# Altium PCB orbit_PA_devboard.PcbDoc
Units mil, origin at the board's own origin, x right, y up, seen from the top; angles counter-clockwise.
Board outline 1563 x 1383 mil, 4 copper layers (Top Layer, Signal Layer 1, Signal Layer 2, Bottom Layer), stack 30.634 mil thick; 24 components, 13 nets, 74 pads, 167 vias.
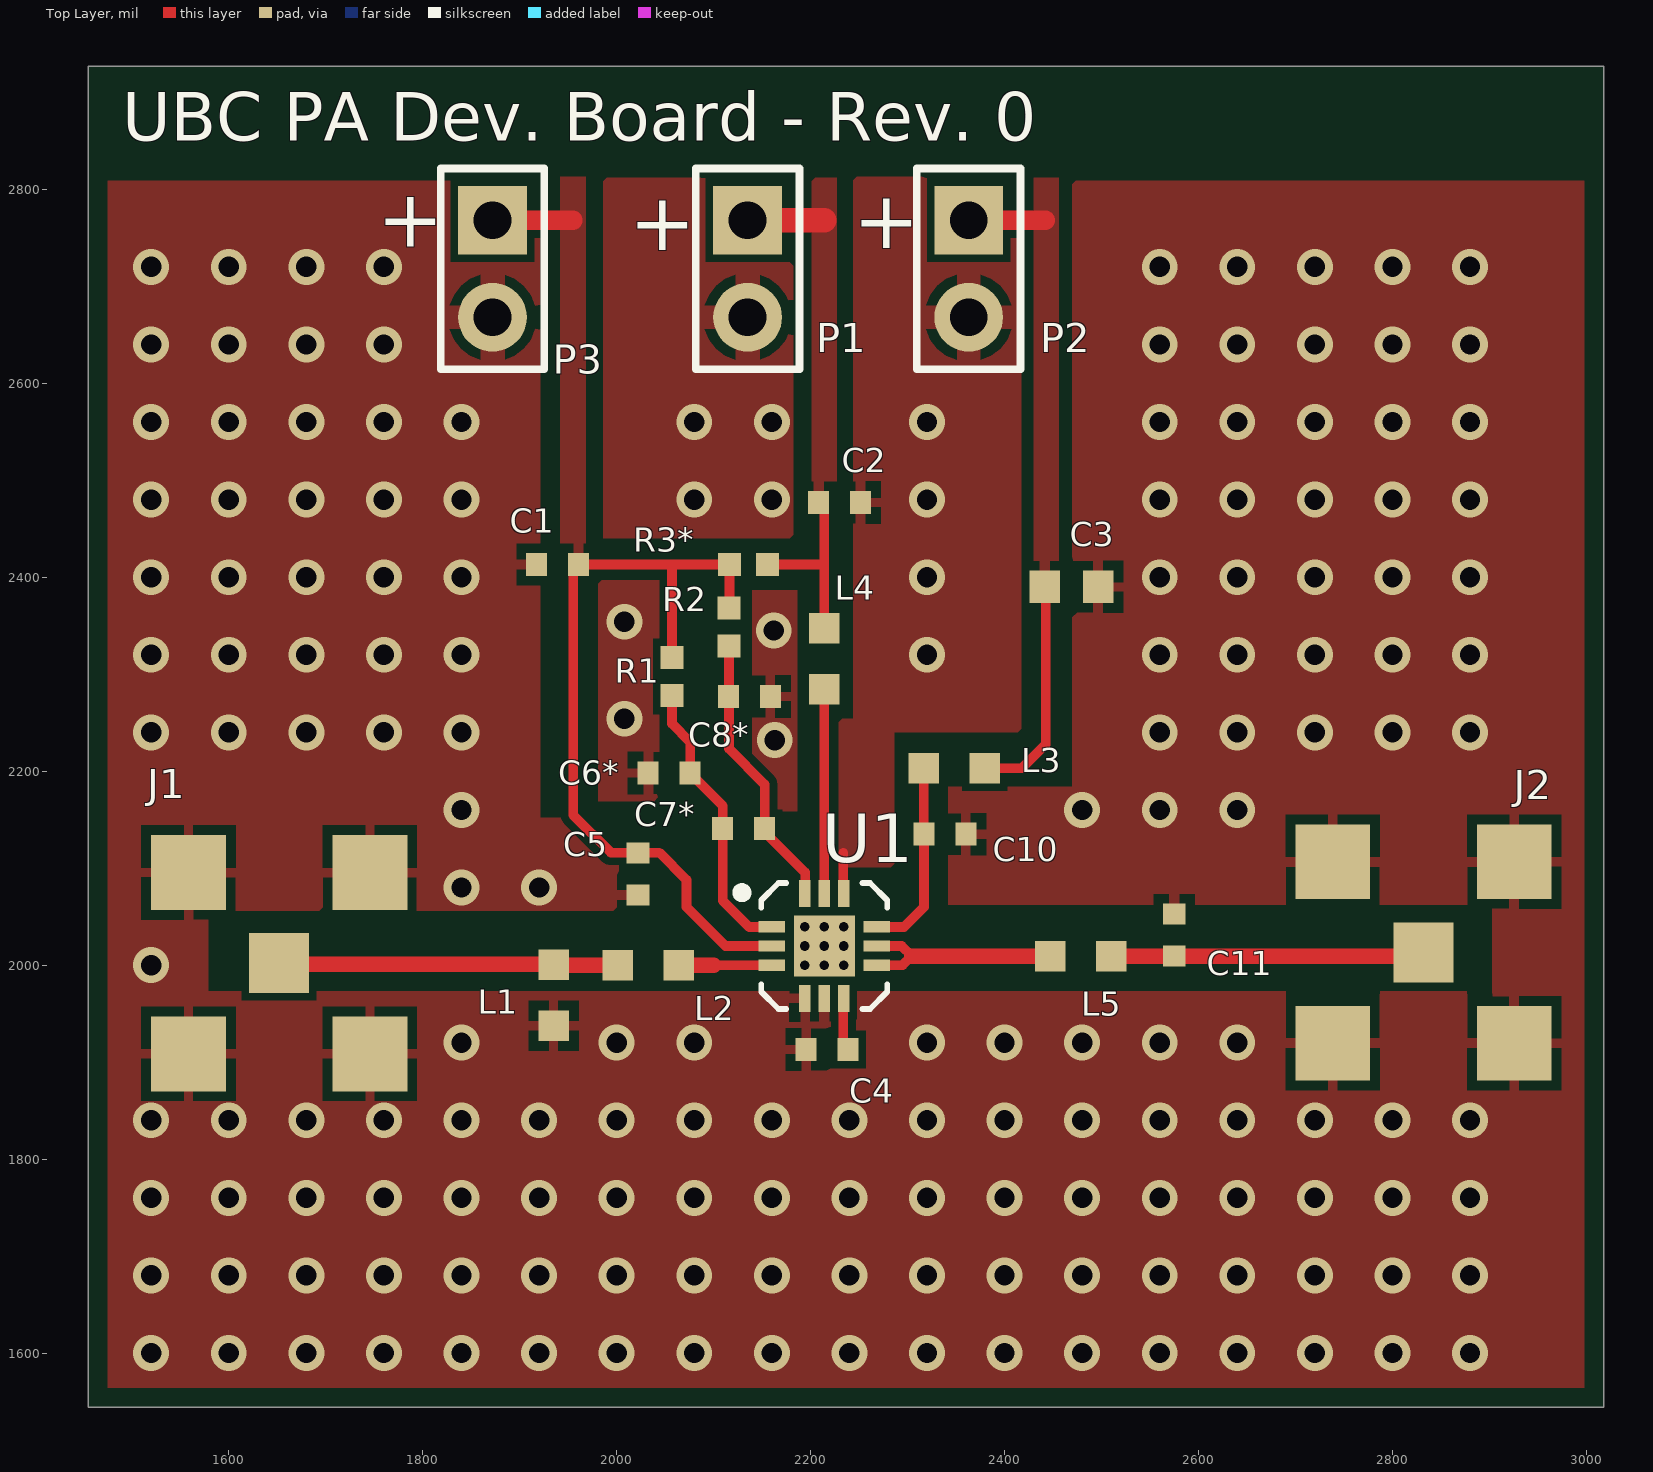
[diagram p0: Top Layer view]
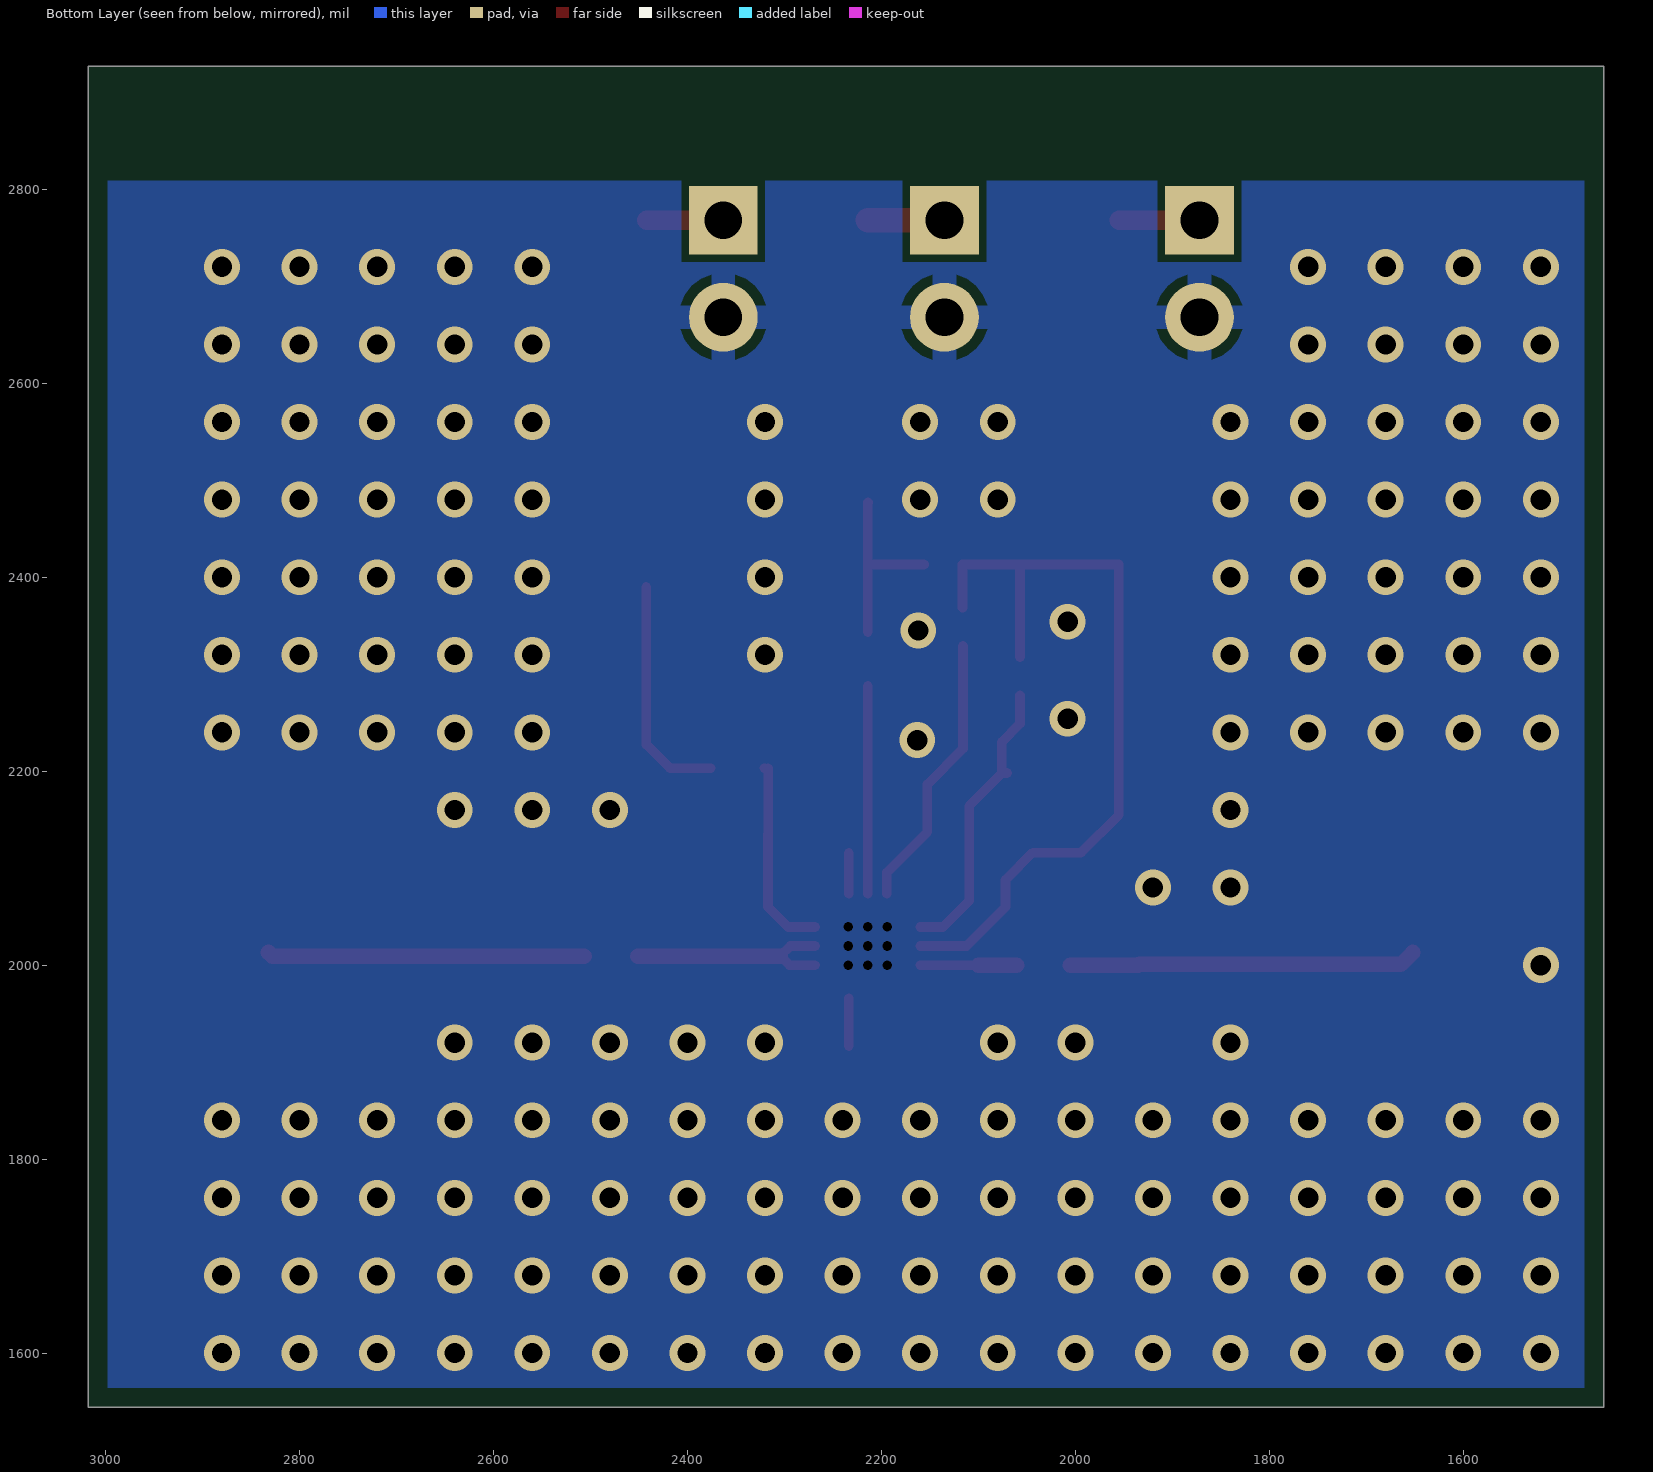
[diagram p1: Bottom Layer view, seen from below]
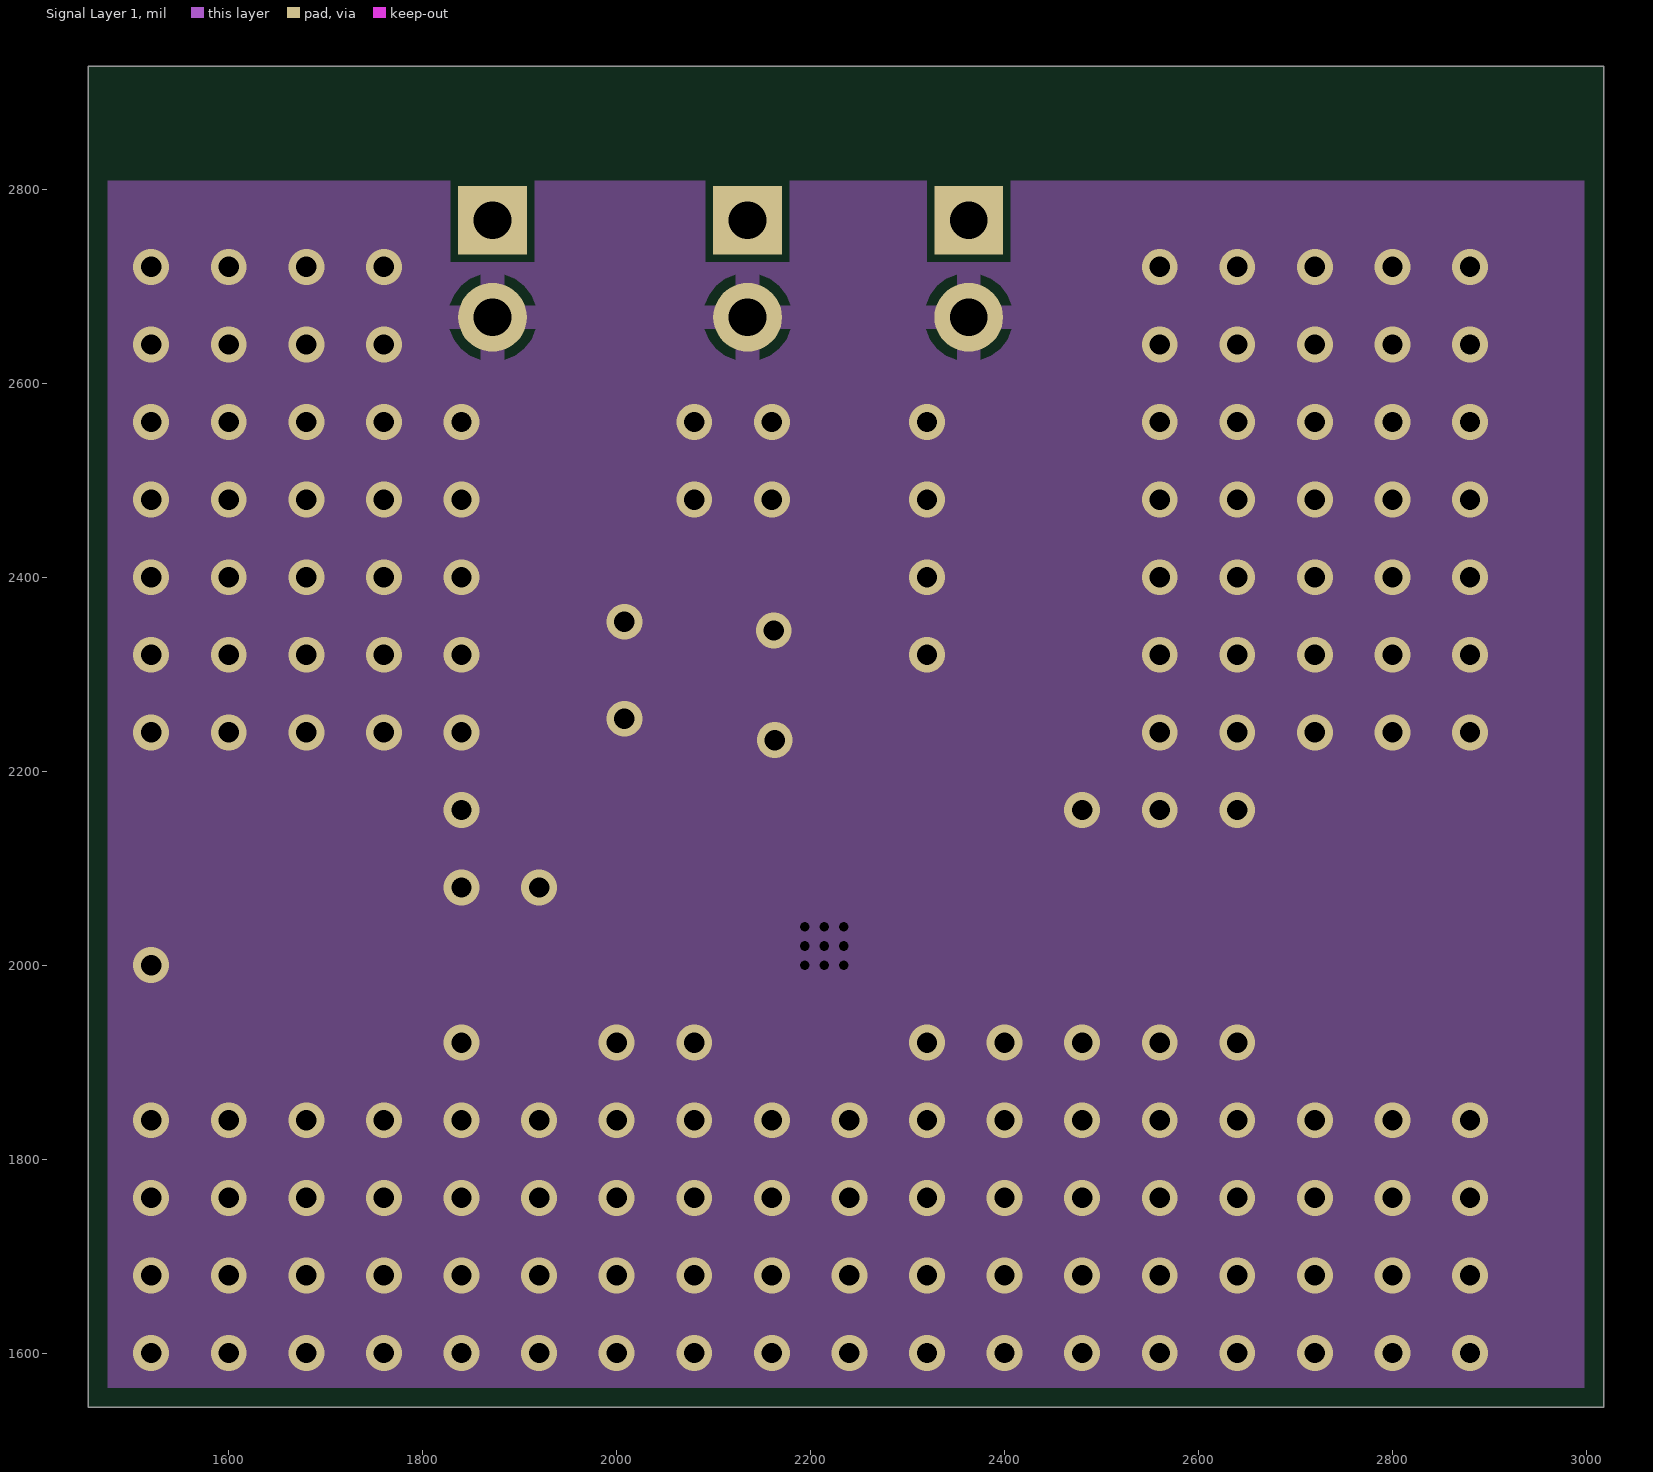
[diagram p2: Signal Layer 1]
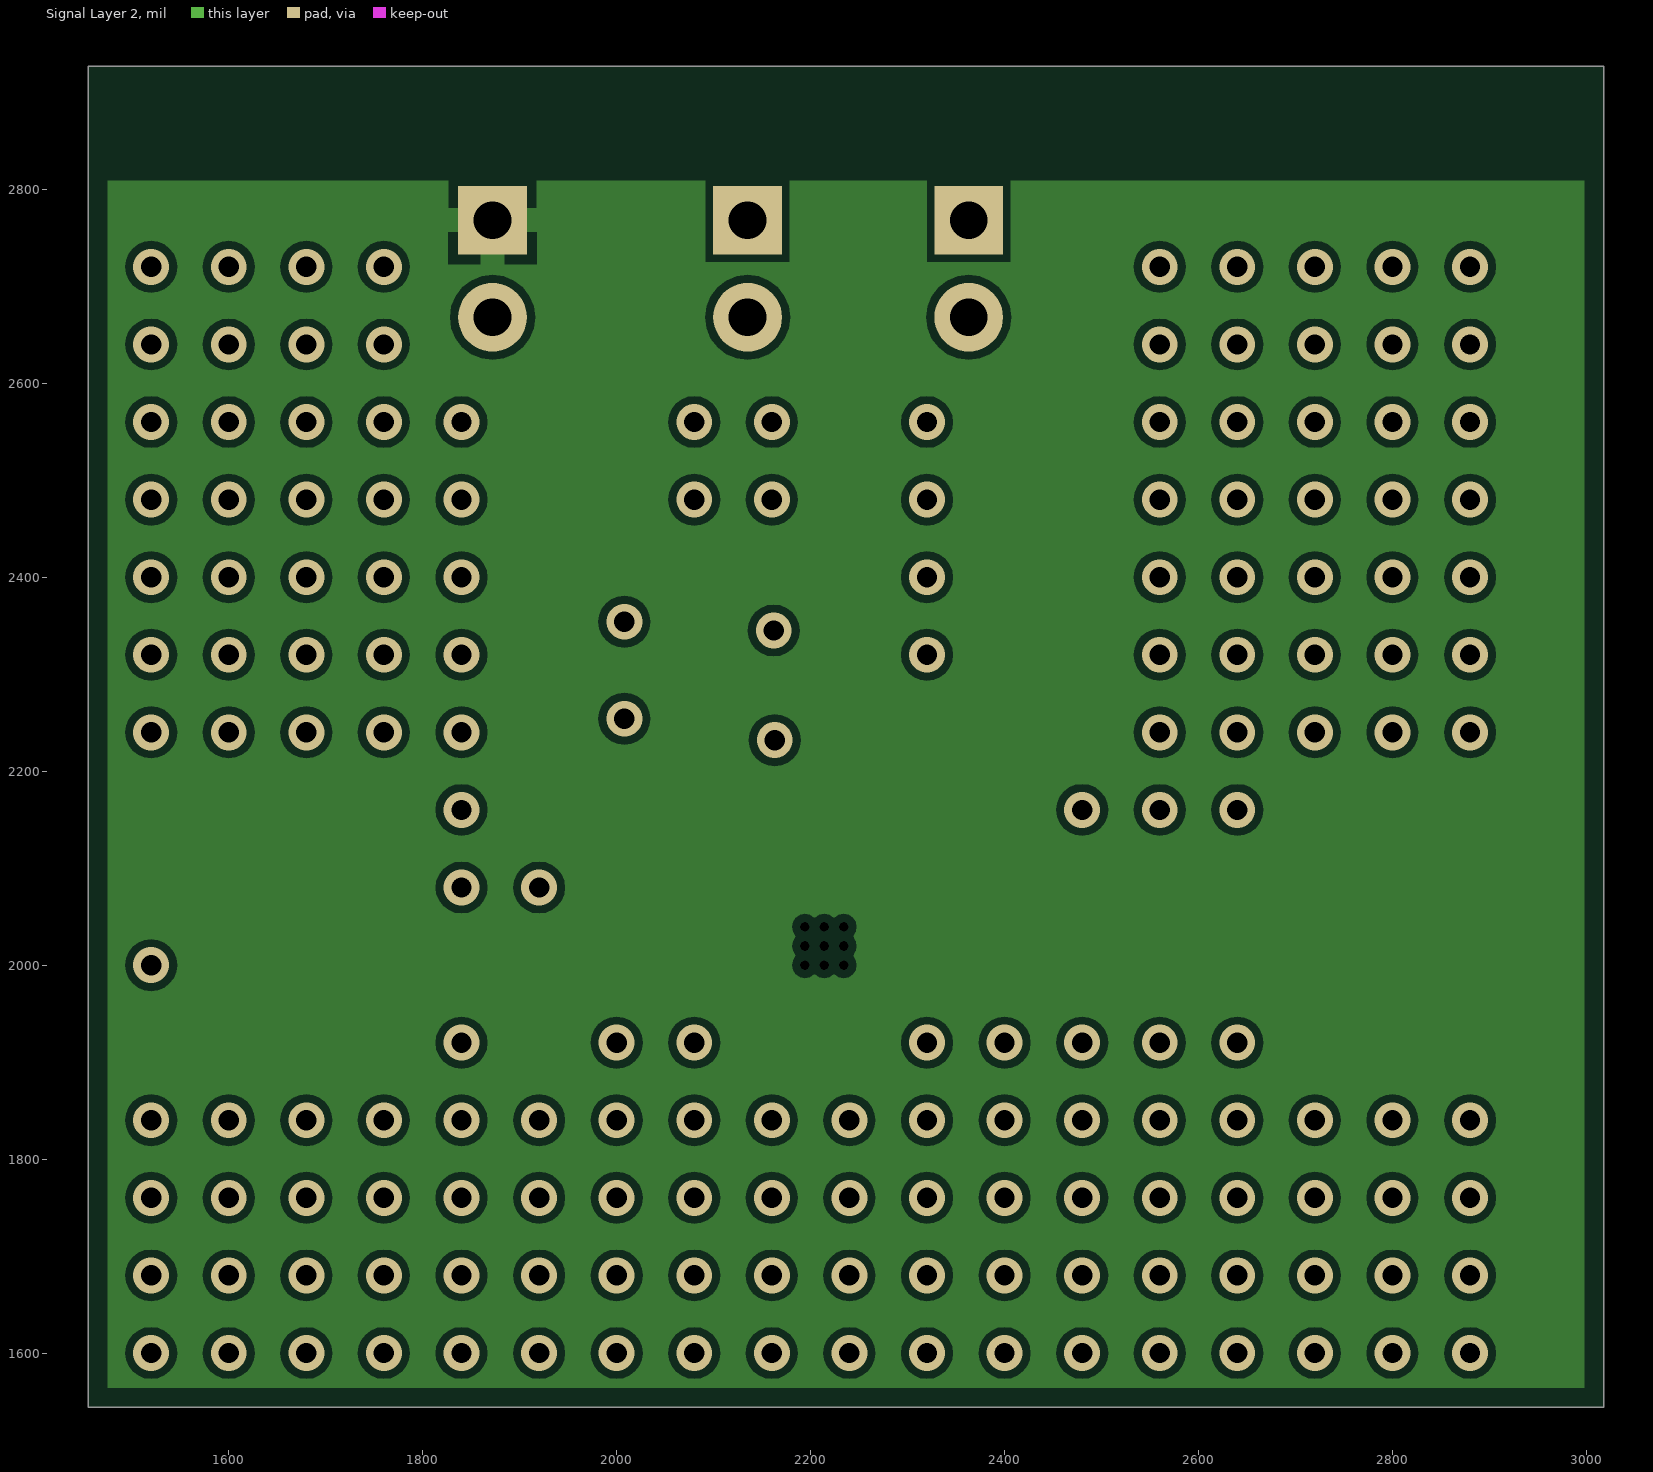
[diagram p3: Signal Layer 2]

## Layer stack, top to bottom
Top Solder: solder mask 0.4, Solder Resist, Dk 3.5
Top Layer: signal copper 1.4
Dielectric 1: core 10, FR-4, Dk 4.2
Signal Layer 1: signal copper 1.417
Dielectric 3: prepreg 5, Dk 4.2
Signal Layer 2: signal copper 1.417
Dielectric 2: core 10, Dk 4.2
Bottom Layer: signal copper 1.4
Bottom Solder: solder mask 0.4, Solder Resist, Dk 3.5

## Board outline
1455,1544 3018,1544 3018,2927 1455,2927

## Design rules (kind name [scope] priority, off if disabled: settings)
BoardOutlineClearance [All] p1: gap=20 ignorepadtopadclearanceinfootprint=FALSE except(0: Arc-SplitContinuation Track-SplitContinuation SMDPad-SplitContinuation THPad-SplitContinuation Via-SplitContinuation Fill-SplitContinuation Poly-SplitContinuation Region-SplitContinuation Text-SplitContinuation; 10: Text-OutlineEdge Text-CavityEdge Text-CutoutEdge Text-SplitBarrior)
Clearance [All] p1: gap=8 ignorepadtopadclearanceinfootprint=FALSE
HoleSize [All] p1: absolutevalues=TRUE maxlimit=100 minlimit=9.84 maxpercent=80.000 minpercent=20.000
MinimumAnnularRing [All] p1: minimumring=8
MinimumSolderMaskSliver [All] p1: minsoldermaskwidth=4
PolygonConnect PolygonConnect_1 [All vs IsVia] p1: connectstyle=Direct reliefconductorwidth=10 reliefentries=4 polygonreliefangle="90 Angle" airgapwidth=10
PolygonConnect PolygonConnect_2 [All vs HasFootprint('QFN 3X3')] p2: thpad.connectstyle=Direct thpad.reliefconductorwidth=10 thpad.reliefentries=4 thpad.polygonreliefangle="90 Angle" thpad.airgapwidth=10 smdpad.connectstyle=Relief smdpad.reliefconductorwidth=10 smdpad.reliefentries=4 smdpad.polygonreliefangle="90 Angle" smdpad.airgapwidth=10 via.connectstyle=Direct via.reliefconductorwidth=10 via.reliefentries=4 via.polygonreliefangle="90 Angle" via.airgapwidth=10
PolygonConnect PolygonConnect_3 [All vs HasFootprint('HDR1X2_LGE1.0')] p3: connectstyle=Relief reliefconductorwidth=25 reliefentries=4 polygonreliefangle="90 Angle" airgapwidth=10
PolygonConnect [All] p4: connectstyle=Relief reliefconductorwidth=10 reliefentries=4 polygonreliefangle="90 Angle" airgapwidth=10
RoutingVias [All] p1: holewidth=28 width=50 viastyle="Through Hole" minholewidth=28 minwidth=50 maxholewidth=28 maxwidth=50
SilkToSilkClearance [All] p1: silktosilkclearance=8
SolderMaskExpansion [All] p1: expansion=3
Width [All] p1: maxlimit=150 minlimit=10 preferedwidth=10
27 further rules are at their usual default settings.

## Components (designator, comment, footprint, x,y, rotation, side; value= is the part's Value field where it differs from the comment)
C1 "1u" "CAP 1005 (0402) B-DENSITY" 1939,2413 r0 top
C2 "1u" "CAP 1005 (0402) B-DENSITY" 2230,2477 r180 top
C3 "4.7u" "CAP 1608 (0603) B-DENSITY" 2469,2390 r180 top
C4 "470p" "CAP 1005 (0402) B-DENSITY" 2217,1913 r180 top
C5 "100p" "CAP 1005 (0402) B-DENSITY" 2022,2094 r90 top
C6* "10p" "CAP 1005 (0402) B-DENSITY" 2054.14,2198 r0 top
C7* "10p" "CAP 1005 (0402) B-DENSITY" 2131,2141 r180 top
C8* "10p" "CAP 1005 (0402) B-DENSITY" 2137,2277 r180 top
C10 "3.9p" "CAP 1005 (0402) B-DENSITY" 2338.65,2135 r180 top
C11 "10p" "CAP 1005 (0402) B-DENSITY" 2575,2031 r270 top
J1 "Molex 0732511350" "MOLEX 732511350" 1652,2002 r0 top
J2 "Molex 0732511350" "MOLEX 732511350" 2832,2013 r0 top
L1 "18n" "IND 1608 (0603)" 1935,1969.02 r90 top
L2 "1.2n" "IND 1608 (0603)" 2032.76,2000 r0 top
L3 "3.9n" "IND 1608 (0603)" 2348.24,2203 r180 top
L4 "12n" "IND 1608 (0603)" 2214.13,2315.76 r270 top
L5 "12n" "IND 1608 (0603)" 2478.76,2009.31 r0 top
P1 "C-Hdr1x2" HDR1X2_LGE1.0 2135,2718 r270 top
P2 "C-Hdr1x2" HDR1X2_LGE1.0 2363,2718 r270 top
P3 "C-Hdr1x2" HDR1X2_LGE1.0 1872,2718 r270 top
R1 "330R" "RES 1005 (0402)" 2057,2297.68 r90 top
R2 "1R5k" "RES 1005 (0402)" 2116,2348.68 r90 top
R3* "330R" "RES 1005 (0402)" 2136,2413 r180 top
U1 "MMZ09312BT1" "QFN 3X3" 2214.13,2019.68 r0 top

## Footprints (in the part's own frame and the unit in brackets; to place one, negate y for a bottom-side part, rotate by r counter-clockwise, add the part's x,y. Pads: shape width x height; smd on the part's side, far side on the other; paste and mask are expansions set on the pad)
"CAP 1005 (0402) B-DENSITY" [mm]
  rect 0.55x0.6 smd: 1(-0.55,0) 2(0.55,0)
  body extent -0.53,-0.28 0.53,0.27, height 0.6
"CAP 1608 (0603) B-DENSITY" [mm]
  rect 0.8x0.85 smd: 1(-0.7,0) 2(0.7,0)
  body extent -0.87,-0.48 0.87,0.47, height 0.92
HDR1X2_LGE1.0 [mm] "Connector; Header; 2 Position; 2.54mm (100mil) pitch"
  rect 1.8x1.8 hole 0.991: 1(-1.27,0)
  round 1.8 hole 0.991: 2(1.27,0)
  silkscreen extent -2.63,-1.36 2.63,1.36, body extent -2.54,-1.24 2.54,1.25, height 8.54
"IND 1608 (0603)" [mm]
  rect 0.8x0.8 smd: 1(-0.8,0) 2(0.8,0)
  body extent -0.87,-0.48 0.87,0.47, height 0.95
"MOLEX 732511350" [mm] "SMA Connector"
  rect 1.57x1.57 smd: 1(0,0)
  rect 1.96x1.96 smd: 2(-2.375,-2.375) 2(-2.375,2.375) 2(2.375,-2.375) 2(2.375,2.375)
  body extent -3.17,-3.17 3.18,3.18, height 9.55
"QFN 3X3" [mm] "QFN, 12-Leads, Body 3.00x3.00mm, Pitch 0.50mm, Thermal Pad 1.50x1.50mm, IPC Medium Density (MMZ)"
  round 0 hole 0.25 paste+0 mask+0: 0(-0.508,-0.508) 0(-0.508,0) 0(-0.508,0.508) 0(0,-0.508) 0(0,0) 0(0,0.508) 0(0.508,-0.508) 0(0.508,0) 0(0.508,0.508)
  rect 1.6x1.6 smd: 0(0,0)
  rect 0.7x0.3 smd: 1(-1.375,0.508) 2(-1.375,0) 3(-1.375,-0.508) 7(1.375,-0.508) 8(1.375,0) 9(1.375,0.508)
  rect 0.3x0.7 smd: 4(-0.508,-1.375) 5(0,-1.375) 6(0.508,-1.375) 10(0.508,1.375) 11(0,1.375) 12(-0.508,1.375)
  silkscreen extent -2.28,-1.65 1.65,1.65, body extent -1.5,-1.5 1.5,1.5, height 0.9
"RES 1005 (0402)" [mm]
  rect 0.6x0.6 smd: 1(-0.5,0) 2(0.5,0)
  body extent -0.5,-0.25 0.5,0.25, height 0.35

## Part data
C1 C2: library part "CAPACITOR (GENERAL)", "Capacitor", Supplier Part Number 1=1276-1076-1-ND, Supplier 1=Digi-Key
C3: library part "CAPACITOR (GENERAL)", "Capacitor", Supplier Part Number 1=490-7203-1-ND, Supplier 1=Digi-Key
C4: library part "CAPACITOR (GENERAL)", "Capacitor", Supplier Part Number 1=490-1297-1-ND, Supplier 1=Digi-Key
C5: library part "CAPACITOR (GENERAL)", "Capacitor", Supplier Part Number 1=399-3194-1-ND, Supplier 1=Digi-Key
C6* C7* C8* C11: library part "CAPACITOR (GENERAL)", "Capacitor", Supplier Part Number 1=490-3113-1-ND, Supplier 1=Digi-Key
C10: library part "CAPACITOR (GENERAL)", "Capacitor", Supplier Part Number 1=478-4424-1-ND, Supplier 1=Digi-Key
J1 J2: library part "SMA CONNECTOR (GENERAL)", Supplier Part Number 1=WM9357-ND, Supplier 1=Digi-Key
L1: library part "INDUCTOR (GENERAL)", "Inductor", Supplier Part Number 1=490-6577-1-ND, Supplier 1=Digi-Key
L2: library part "INDUCTOR (GENERAL)", "Inductor", Supplier Part Number 1=490-1099-1-ND, Supplier 1=Digi-Key
L3: library part "INDUCTOR (GENERAL)", "Inductor", Supplier Part Number 1=490-1105-1-ND, Supplier 1=Digi-Key
L4 L5: library part "INDUCTOR (GENERAL)", "Inductor", Supplier Part Number 1=490-17900-1-ND, Supplier 1=Digi-Key
P1 P2 P3: "Header, 2-Pin", LatestRevisionDate=17-Jul-2002, LatestRevisionNote="Re-released for DXP Platform.", Publisher="Altium Limited"
R1 R3*: library part "RESISTOR (GENERAL)", "Resistor", Supplier Part Number 1=RC0402JR-07330RL, Supplier 1=Digi-Key
R2: library part "RESISTOR (GENERAL)", "Resistor", Supplier Part Number 1=RC0402FR-071K5L, Supplier 1=Digi-Key
U1: "IC RF AMP CDMA 400MHZ-1GHZ 12QFN", Supplier Part Number 1=MMZ09312BT1TR-ND, Supplier 1=Digi-Key

## Via types
v1: diameter 37, hole 21, Top Layer to Bottom Layer, 167 vias

## Nets (pads, with @x,y where several pads share a name; then routed paths per layer and width w, separated by ;. In a path a pad name is that pad's centre, name@x,y a point inside that pad or via, vN(x,y) a via of type N, cw(c..) or ccw(c..) an arc to the next point about the centre after c; other vN are vias at no path point)
GND: C1.1 C2.1 C3.1 C4.2 C5.1 C6*.1 C8*.1 C10.1 C11.1 J1.2 J2.2 L1.1 P1.2 P2.2 P3.2 U1.0 U1.4 U1.5 U1.10 | length 42
  Top Layer w10: U1.10@2233.82,2073.82 2233.82,2115.82
  other v1: 1520,1600 1600,1600 1680,1600 1760,1600 1840,1600 1920,1600 2000,1600 2080,1600 2160,1600 2240,1600 2320,1600 2400,1600 2480,1600 2560,1600 2640,1600 2720,1600 2800,1600 2880,1600 1520,1680 1600,1680 1680,1680 1760,1680 1840,1680 1920,1680 2000,1680 2080,1680 2160,1680 2240,1680 2320,1680 2400,1680 2480,1680 2560,1680 2640,1680 2720,1680 2800,1680 2880,1680 1520,1760 1600,1760 1680,1760 1760,1760 1840,1760 1920,1760 2000,1760 2080,1760 2160,1760 2240,1760 2320,1760 2400,1760 2480,1760 2560,1760 2640,1760 2720,1760 2800,1760 2880,1760 1520,1840 1600,1840 1680,1840 1760,1840 1840,1840 1920,1840 2000,1840 2080,1840 2160,1840 2240,1840 2320,1840 2400,1840 2480,1840 2560,1840 2640,1840 2720,1840 2800,1840 2880,1840 1840,1920 2000,1920 2080,1920 2320,1920 2400,1920 2480,1920 2560,1920 2640,1920 1520,2000 1840,2080 1920,2080 1840,2160 2480,2160 2560,2160 2640,2160 2163,2232 1520,2240 1600,2240 1680,2240 1760,2240 1840,2240 2560,2240 2640,2240 2720,2240 2800,2240 2880,2240 2008,2254 1520,2320 1600,2320 1680,2320 1760,2320 1840,2320 2320,2320 2560,2320 2640,2320 2720,2320 2800,2320 2880,2320 2162,2345 2008,2354 1520,2400 1600,2400 1680,2400 1760,2400 1840,2400 2320,2400 2560,2400 2640,2400 2720,2400 2800,2400 2880,2400 1520,2480 1600,2480 1680,2480 1760,2480 1840,2480 2080,2480 2160,2480 2320,2480 2560,2480 2640,2480 2720,2480 2800,2480 2880,2480 1520,2560 1600,2560 1680,2560 1760,2560 1840,2560 2080,2560 2160,2560 2320,2560 2560,2560 2640,2560 2720,2560 2800,2560 2880,2560 1520,2640 1600,2640 1680,2640 1760,2640 2560,2640 2640,2640 2720,2640 2800,2640 2880,2640 1520,2720 1600,2720 1680,2720 1760,2720 2560,2720 2640,2720 2720,2720 2800,2720 2880,2720
NetC11_2: C11.2 J2.1 L5.2 | length 327
  Top Layer w16: L5.2@2506.51,2009.31 L5.2 C11.2 ; C11.2 J2.1@2828.28,2009.35 ; J2.1@2828.31,2009.31 J2.1
NetJ1_1: J1.1 L1.2 L2.1 | length 370.1
  Top Layer w10: L1.2 1946,2000.51 L1.2@1946.51,2000
  Top Layer w16: J1.1@1652,2013 1664.24,2000.76 1934.24,2000.76 1935,2000 1946.51,2000 L2.1 L2.1@2005,2000
PDET: C4.1 U1.6 | length 48.9
  Top Layer w10: C4.1@2233.82,1916.68 U1.6@2233.82,1965.55
RF_IN: L2.2 U1.3 | length 95.5
  Top Layer w10: 2104,2000 U1.3@2160,2000
  Top Layer w16: L2.2@2060.51,2000 L2.2 2100,2000
RF_OUT: L5.1 U1.7 U1.8 | length 226.9
  Top Layer w10: U1.7@2268.27,2000 2295,2000 2304.31,2009.31 2293.94,2019.68 U1.8
  Top Layer w16: 2304.31,2009.31 L5.1 L5.1@2451,2009.31
VBA1: C6*.2 C7*.2 R1.1 U1.1 | length 300.5
  Top Layer w10: R1.1 2057,2249 2075.8,2230.2 C6*.2 ; C6*.2@2070.28,2198 C6*.2 ; U1.1@2160,2039.37 2136.63,2039.37 2109.35,2066.65 C7*.2 2109.35,2164.45 C6*.2
VBA2: C7*.1 C8*.2 R2.1 U1.12 | length 288.1
  Top Layer w10: R2.1 2115.86,2328.86 2115.86,2223.14 2152.65,2186.35 C7*.1 2152.65,2137.35 2194.45,2095.55 U1.12@2194.45,2073.5
VBIAS: C1.2 C5.2 P3.1 R1.2 R2.2 R3*.2 U1.2 | length 920.4
  Top Layer w10: R1.2 2057,2412 2056,2413 ; R2.2 2116.32,2368.68 R3*.2 2056,2413 ; U1.2 2112.32,2019.68 2072,2060 2072,2088 2044,2116 1994,2116 1955.14,2154.86 1955.14,2413 C1.2 2056,2413
  Top Layer w20: P3.1 1955,2768
VCC1: C2.2 L4.1 P1.1 R3*.1 | length 271.5
  Top Layer w10: R3*.1 2213.13,2413 2214.13,2412 ; C2.2@2213.86,2477 2214.13,2476.72 2214.13,2412 ; L4.1@2214.13,2343.51 L4.1 2214.13,2412
  Top Layer w25: P1.1 2214,2768
VCC1_IN: L4.2 U1.11 | length 214.2
  Top Layer w10: U1.11 L4.2 L4.2@2214.13,2288
VCC2: C3.2 L3.1 P2.1 | length 318.1
  Top Layer w10: L3.1@2376,2203 L3.1 2418,2203 2442.43,2227.43 C3.2@2442.43,2390
  Top Layer w20: P2.1 2442,2768
VCC2_IN: C10.2 L3.2 U1.9 | length 201.1
  Top Layer w10: U1.9@2268.27,2039.37 2296.37,2039.37 2317,2060 C10.2 2316.75,2135.25 L3.2 ; L3.2@2320,2202.51 L3.2@2320.49,2203

## Polygon pours and split planes (outlines as drawn)
GND on Top Layer "VCC1" (solid, pour order 56): 1471,1944.77 1471,1559 3000.81,1558.99 3000.81,1921.4 3000.81,2149.4 3000,2149.4 3000,2808.76 2470,2808.77 2470,2184 2342,2184 2342,2062 2479,2062 2903,2062 2903,1972.99 1579,1973 1579,2056 2056,2056 2056,2152 1921,2152 1921,2808.77 1470,2808.77 1470,2172.77 1470,1944.77
GND on Top Layer "GND_L01_P032" (solid, pour order 32): 2186,2386.77 2140,2386.77 2140,2158.77 2186,2158.77
GND on Top Layer "VCC1" (solid, pour order 30): 2182,2811.77 1986,2811.77 1986,2440 2182,2440
VBIAS on Top Layer "VCC1" (solid, remove dead copper, pour order 4): 1968,2813 1942,2813 1942,2413 1968,2413
VCC1 on Top Layer "VCC1" (solid, remove dead copper, pour order 16): 2227,2812 2201,2812 2201,2466.9 2227,2466.9
GND on Top Layer "VCC1" (solid, pour order 38): 2229,2254 2229,2100.77 2286,2100.77 2286,2240 2417,2240 2417,2812.77 2244,2812.77 2244,2254
VCC2 on Top Layer "VCC1" (solid, remove dead copper, pour order 18): 2456,2812 2430,2812 2430,2382.9 2456,2382.9
GND on Top Layer "VCC1" (solid, pour order 28): 2044,2396.77 1981,2396.77 1981,2168.77 2044,2168.77
GND on Bottom Layer "VCC1" (solid, remove dead copper, pour order 22): 1470,2809 3001,2809 3001,1559 1470,1559
GND on Signal Layer 1 "GND-" (solid, remove dead copper, pour order 62): 1470,2809 3001,2809 3001,1559 1470,1559
VBIAS on Signal Layer 2 "VBIAS" (solid, remove dead copper, pour order 64): 1470,2809 3001,2809 3001,1559 1470,1559

## Silkscreen, mask and mechanical layers (free items; w line width, h text height)
Top Overlay:
  text "UBC PA Dev. Board - Rev. 0" at 1490,2850 h50
  text "+" at 1753,2741 h60
  text "+" at 2244,2739 h60
  text "+" at 2013,2737 h60
Mechanical 1:
  the board outline again, w10